# EAGLE board PCB_Final (EAGLE 9.7.0)
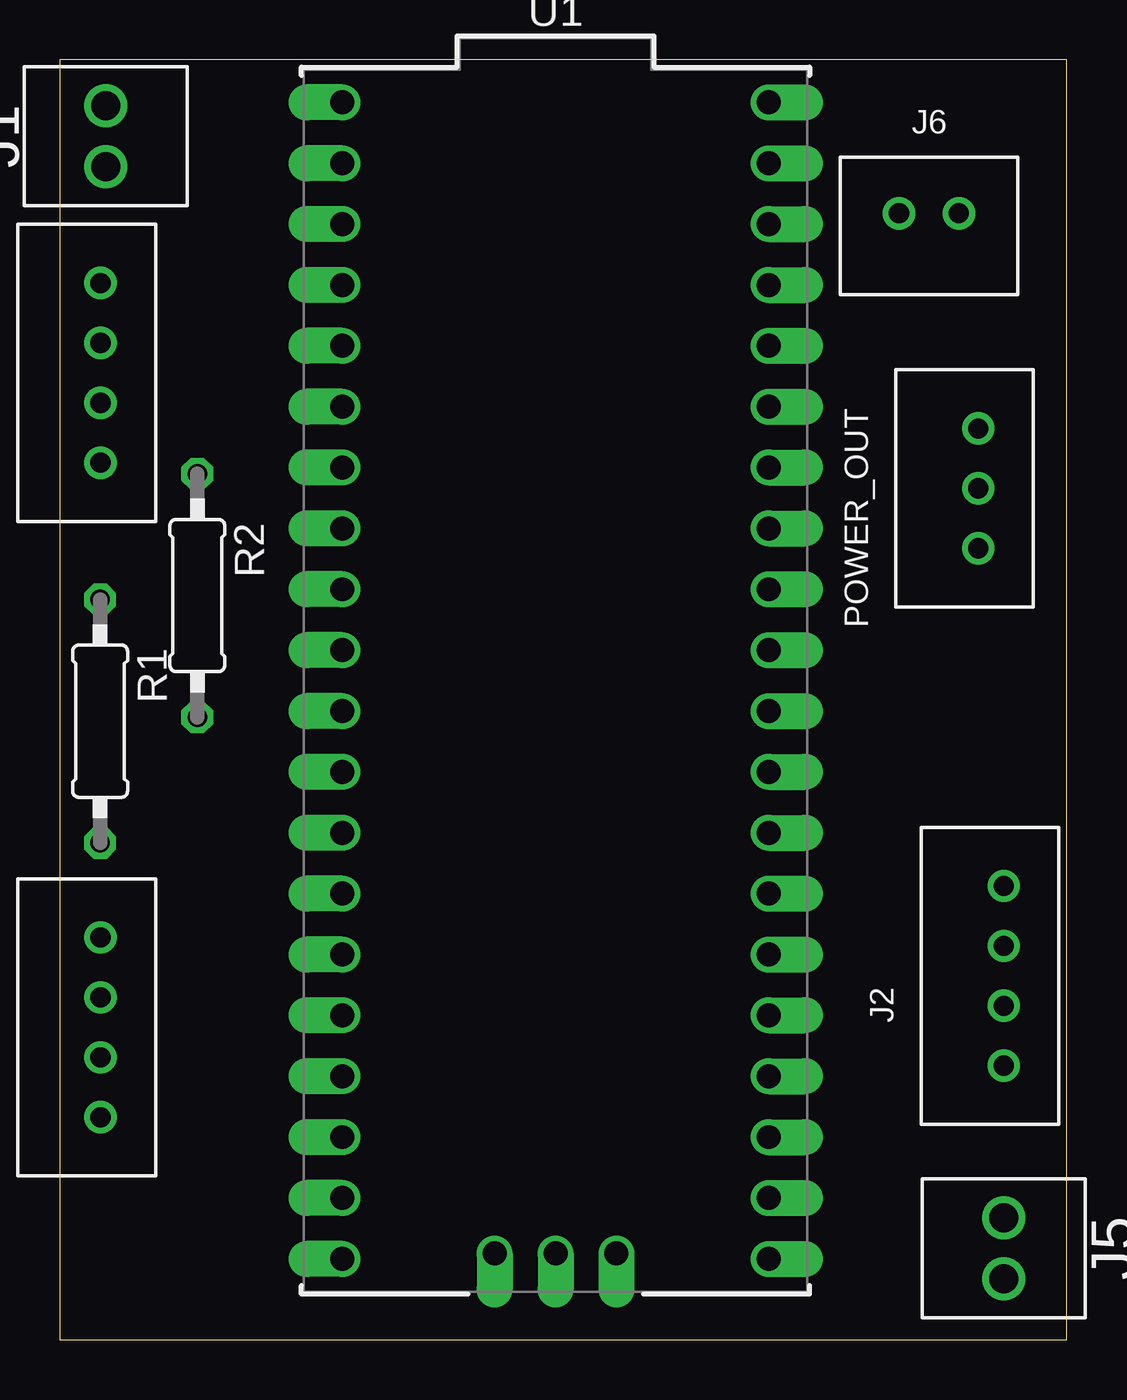
[diagram p0: board, top side]
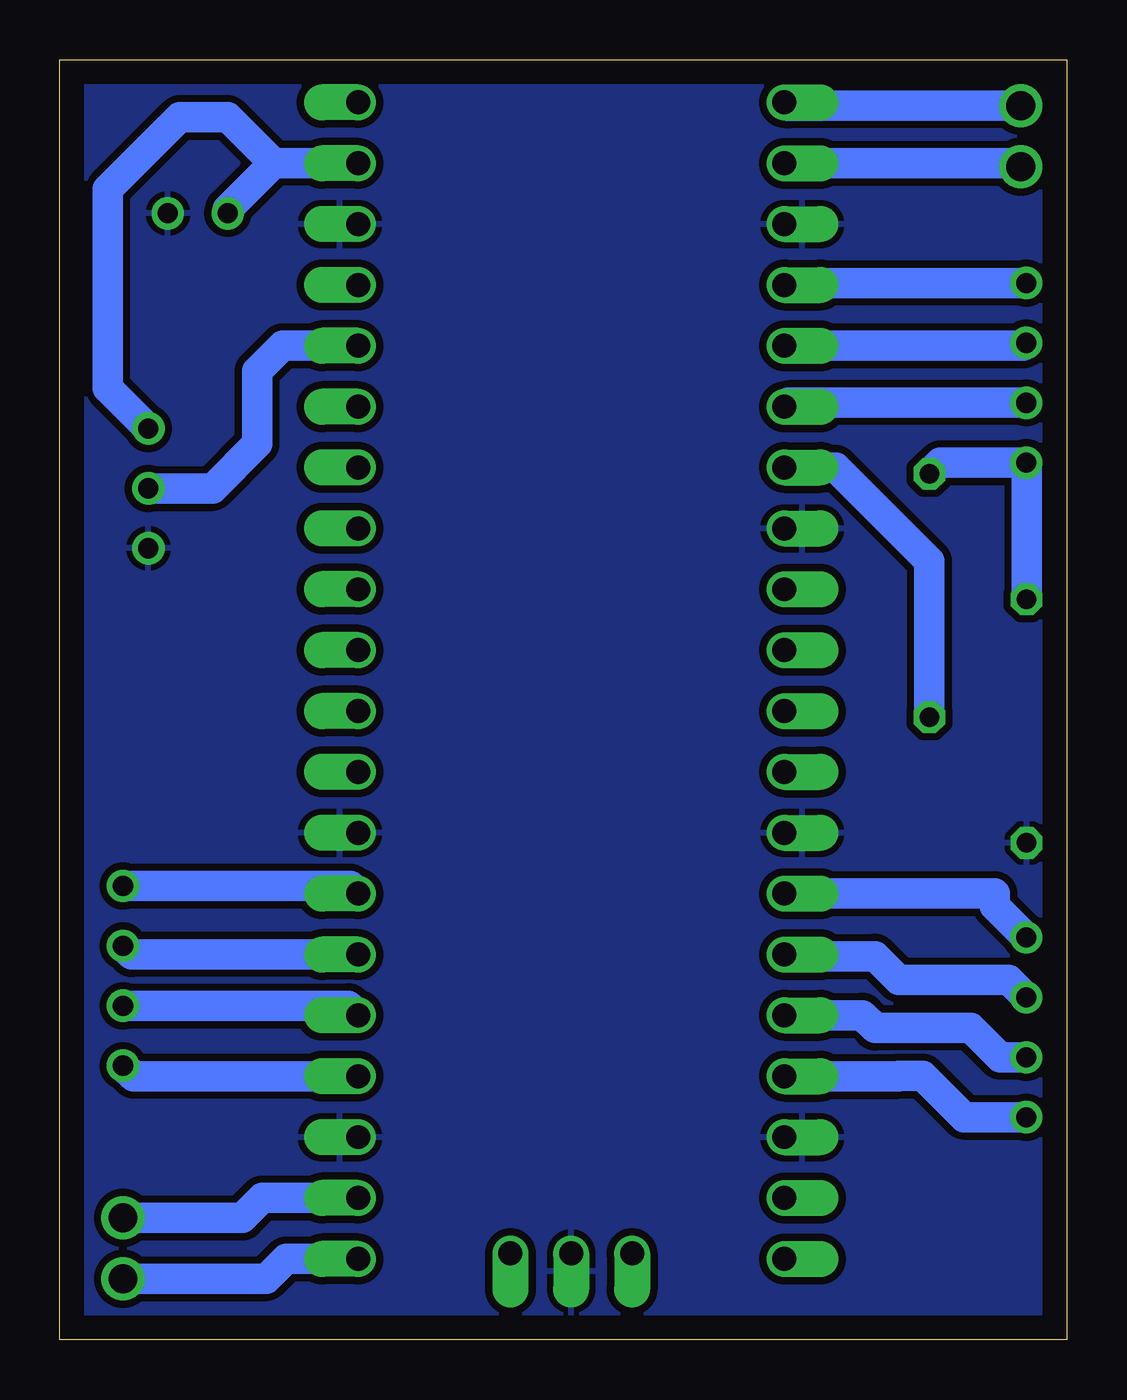
[diagram p1: board, bottom side, seen from below]

Size 42 x 53.4 mm. Coordinates in mm from the lower left corner, seen from the top.
Outline: 0,0 42,0 42,53.4 0,53.4 0,0
Copper layers (1*16): Top 0.035mm / dielectric 1.5mm / Bottom 0.035mm
Design rules "Fusion Electronics Design Rules": minimum track width 6mil, minimum drill 0.35mm, track to track 6mil, track to pad 6mil, pad to pad 6mil, via to via 6mil, smd to smd 6mil, copper to edge 40mil, drill to drill 6mil, minimum pad ring 10mil, minimum via ring 8mil, stop-mask expansion 4mil, vias tented up to drill 9999mil, thermal gap 10mil

## Footprints (pad centres in the part's own frame; a part is rotated, then mirrored left to right if it is on the bottom)
TERMBLK_254-2N = drill 1.2: 1 0,0; 2 2.54,0
B4B-XH-A = drill 0.84: 1 0,0; 2 2.5,0; 3 5,0; 4 7.5,0
B2B-XH-A = drill 0.84: 1 0,0; 2 2.5,0
B3B-XH-A = drill 0.84: 1 0,0; 2 2.5,0; 3 5,0
0207/10 = drill 0.813 octagon: 1 -5.08,0; 2 5.08,0
PI_PICO_H = drill 1 offset: 1 -8.89,24.13; 2 -8.89,21.59; 3 -8.89,19.05; 4 -8.89,16.51; 5 -8.89,13.97; 6 -8.89,11.43; 7 -8.89,8.89; 8 -8.89,6.35; 9 -8.89,3.81; 10 -8.89,1.27; 11 -8.89,-1.27; 12 -8.89,-3.81; 13 -8.89,-6.35; 14 -8.89,-8.89; 15 -8.89,-11.43; 16 -8.89,-13.97; 17 -8.89,-16.51; 18 -8.89,-19.05; 19 -8.89,-21.59; 20 -8.89,-24.13; 21 8.89,-24.13; 22 8.89,-21.59; 23 8.89,-19.05; 24 8.89,-16.51; 25 8.89,-13.97; 26 8.89,-11.43; 27 8.89,-8.89; 28 8.89,-6.35; 29 8.89,-3.81; 30 8.89,-1.27; 31 8.89,1.27; 32 8.89,3.81; 33 8.89,6.35; 34 8.89,8.89; 35 8.89,11.43; 36 8.89,13.97; 37 8.89,16.51; 38 8.89,19.05; 39 8.89,21.59; 40 8.89,24.13; D1 -2.54,-23.9; D2 0,-23.9; D3 2.54,-23.9

## Placement (x,y rotation side)
J1  TERM-BLK-2P  [TERMBLK_254-2N]  1.92,51.48 270 top
J2  JST-XH-4PIN  [B4B-XH-A]  39.37,11.43 90 top
J3  JST-XH-4PIN  [B4B-XH-A]  1.69,36.59 90 top
J4  JST-XH-4PIN  [B4B-XH-A]  1.69,9.28 90 top
J5  TERM-BLK-2P  [TERMBLK_254-2N]  39.37,2.54 90 top
J6  JST-XH-2PIN  [B2B-XH-A]  35,47 0 top
POWER_OUT  JST-XH-3PIN  [B3B-XH-A]  38.31,33.02 90 top
R1  [0207/10]  1.68,25.81 270 top
R2  [0207/10]  5.73,31.05 270 top
U1  RPI_PICO_H  [PI_PICO_H]  20.67,27.5 0 top

## Library data of the parts
J1 J5 = Connector; CATEGORY: Fixed Terminal Blocks; DESCRIPTION: Fixed Terminal Blocks 2P SIDE ENTRY 2.54mm; MANUFACTURER: TE Connectivity AMP Connectors; MPN: 282834-2; OPERATING_TEMPERATURE: -40°C ~ 105°C; PART_STATUS: Active; PITCH: 0.100" (2.54mm); ROHS_COMPLIANCE: RoHS Compliant; SERIES: Buchanan; SUBCATEGORY: Terminal Blocks; TYPE: Through Hole; Screw - Rising Cage Clamp; Side wire entry, Horizontal with Board
J2-J4 = Connector; CATEGORY: Header; DSECRIPTION: Connector Header Through Hole 4 position 0.098" (2.50mm); MANUFACTURER: JST Sales America Inc.; MPN: B4B-XH-A(LF)(SN); OPERATING_TEMPERATURE: -25 C to 85 C; PART_STATUS: ACTIVE; PITCH: 0.098" (2.50mm); ROHS_COMPLIANCE: ROHS3 Compliant; SERIES: XH; SUB_CATEGORY: Rectangular Connectors; TYPE: Header, Male Pin, Board to Cable/Wire, Through Hole
J6 = Connector; CATEGORY: Header; DESCRIPTION: Connector Header Through Hole 2 position 0.098" (2.50mm); MANUFACTURER: JST Sales America Inc.; MPN: B2B-XH-A(LF)(SN); OPERATING_TEMPERATURE: -25°C ~ 85°C; PART_STATUS: ACTIVE; PITCH: 0.098" (2.50mm); ROHS_COMPLIANCE: ROHS3 Compliant; SERIES: XH; SUB_CATEGORY: Rectangular Connectors; TYPE: Header, Male Pin, Board to Cable/Wire, Through Hole
POWER_OUT = Connector; CATEGORY: Header; DESCRIPTION: Connector Header Through Hole 3 position 0.098" (2.50mm); MANUFACTURER: JST Sales America Inc.; MPN: B3B-XH-A(LF)(SN); PART_STATUS: ACTIVE; PITCH: 0.098" (2.50mm); ROHS_COMPLIANCE: ROHS3 Compliant; SERIES: XH; SUB_CATEGORY: Rectangular Connectors; TYPE: Header, Male Pin, Board to Cable/Wire, Through Hole
R1 R2 = rcl; SPICEPREFIX: R
U1 = Development_Boards; CATEGORY_L1: Developement Boards; CATEGORY_L2: Evaluation Boards; DATASHEET: https://pip-assets.raspberrypi.com/categories/610-raspberry-pi-pico/documents/RP-008307-DS-1-pico-datasheet.pdf?disposition=inline; DESCRIPTION: RP2040 Raspberry Pi Pico - ARM® Cortex®-M0+ MCU 32-Bit Embedded Evaluation Board; MANUFACTURER: Raspberry Pi; MPN: SC0917; OPERATING_TEMPERATURE: -20°C ~ 85°C; PACKAGE: Through Hole; PART_STATUS: Active; ROHS: Compliant; SERIES: RP2040

## Nets
5V: J6.1 POWER_OUT.3 U1.39
ADC_VREF: U1.35
AGND: U1.33
AIN1: J2.3 U1.26
AIN2: J2.4 U1.27
BIN1: J2.2 U1.25
BIN2: J2.1 U1.24
ECHO_US: J3.1 R1.1 R2.1
GND: J6.2 POWER_OUT.1 R1.2 U1.3 U1.8 U1.13 U1.18 U1.23 U1.28 U1.38 U1.D2
IMU_SCL: J3.3 U1.5
IMU_SDA: J3.4 U1.4
LENCODERA: J1.1 U1.1
LENCODERB: J1.2 U1.2
LINEA1: J4.4 U1.14
LINEA2: J4.3 U1.15
N$1: POWER_OUT.2 U1.36
N$3: R2.2 U1.7
PWMA: J4.2 U1.16
PWMB: J4.1 U1.17
RENCODERA: J5.1 U1.21
RENCODERB: J5.2 U1.22
TRIGG_US: J3.2 U1.6
VBUS: U1.40

## Tracks (layer width: path | path; a pad name or v marks a point on that pad's centre or on a via)
5V
  Bottom 1.27: U1.39 33.09,49.09 | 33.09,49.09 35,51 37,51 40,48 40,39.71 POWER_OUT.3 | 33.09,49.09 35,47.18 J6.1
AIN1
  Bottom 1.27: U1.26 39.01,16.07 J2.3
AIN2
  Bottom 1.27: J2.4 29.88,18.93 U1.27
BIN1
  Bottom 1.27: J2.2 29.96,13.93 U1.25
BIN2
  Bottom 1.27: U1.24 38.93,10.99 J2.1
ECHO_US
  Bottom 1.27: R2.1 5.27,36.59 J3.1 1.68,36.58 R1.1
GND
  pour Bottom (isolate 0.305): 0.1,0.1 41.9,0.1 41.9,52.9 0.1,52.9
IMU_SCL
  Bottom 1.27: U1.5 1.81,41.47 J3.3
IMU_SDA
  Bottom 1.27: J3.4 11.7,44.09 U1.4
LENCODERA
  Bottom 1.27: J1.1 11.64,51.48 U1.1
LENCODERB
  Bottom 1.27: U1.2 2.06,49.09 J1.2
LINEA1
  Bottom 1.27: J4.4 3,18.09 3,18.61 U1.14
LINEA2
  Bottom 1.27: U1.15 11.71,16 8,16 7,15 2.41,15 J4.3
N$1
  Bottom 1.27: U1.36 32.71,41.47 33.77,40.41 33.77,37.38 35.63,35.52 POWER_OUT.2
N$3
  Bottom 1.27: U1.7 9.64,36.39 5.73,32.48 R2.2
PWMA
  Bottom 1.27: J4.2 2.78,11.78 4,13 8,13 8.53,13.53 U1.16
PWMB
  Bottom 1.27: U1.17 7.01,10.99 7,11 6,11 4.28,9.28 J4.1
RENCODERA
  Bottom 1.27: U1.21 32.56,3.37 33.39,2.54 J5.1
RENCODERB
  Bottom 1.27: J5.2 34.39,5.08 33.56,5.91 U1.22
TRIGG_US
  Bottom 1.27: J3.2 11.62,39.09 U1.6